# Altium PCB PCB_LineFollowerFullPCB_2024-01-03.pcbdoc
Units mm, origin at the board's own origin, x right, y up, seen from the top; angles counter-clockwise.
Board outline 305.31 x 202.82 mm, 2 copper layers (Top Layer, Bottom Layer); 47 components, 55 nets, 293 pads, 61 vias.
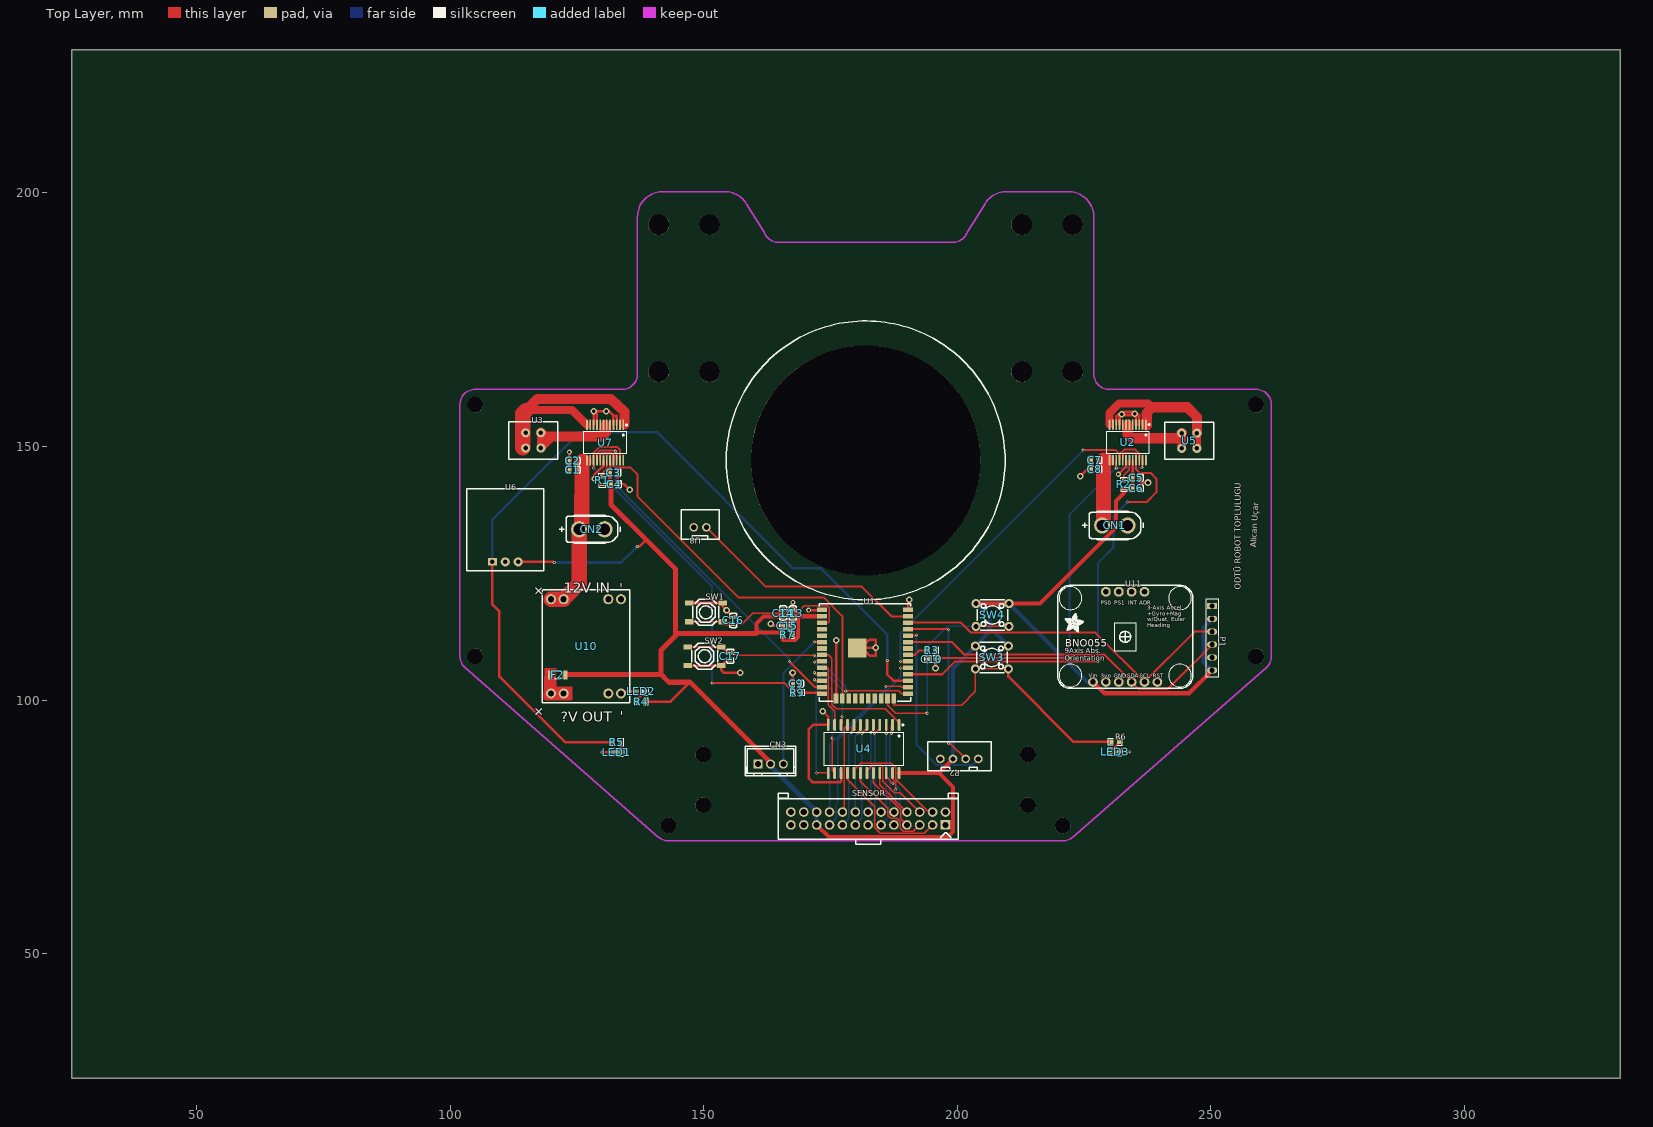
[diagram p0: Top Layer view]
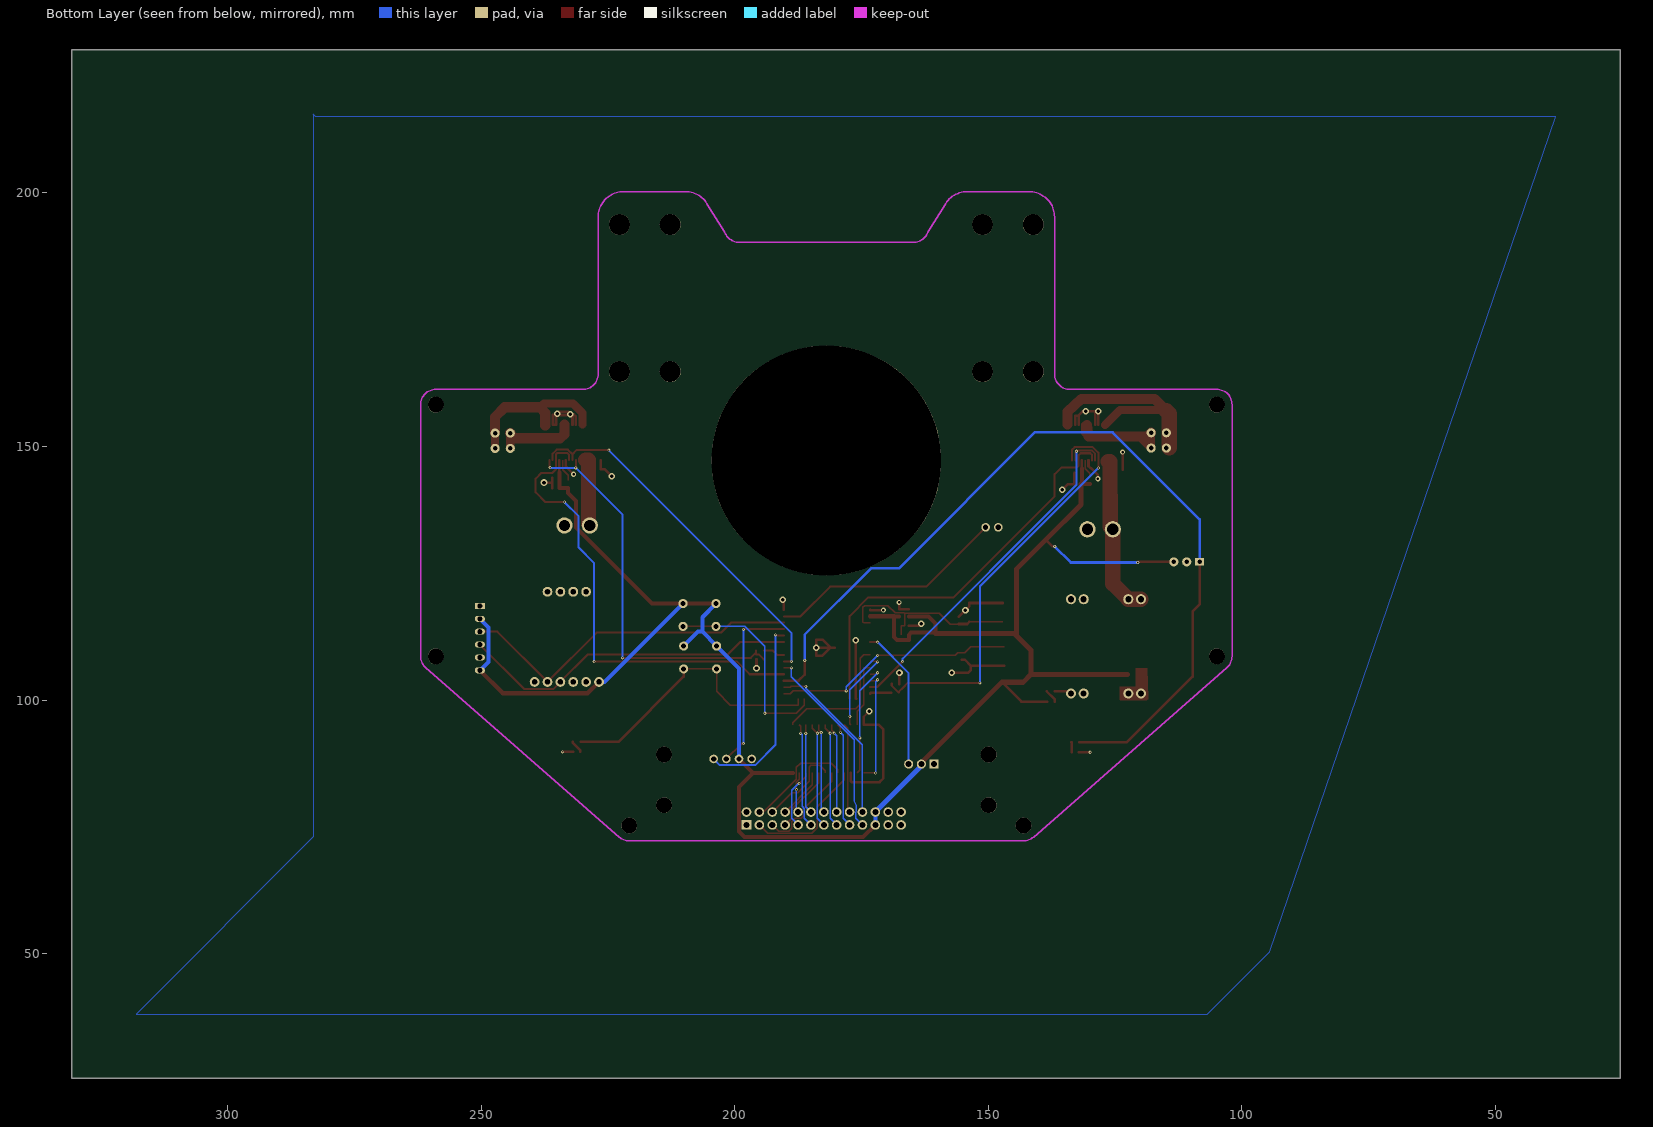
[diagram p1: Bottom Layer view, seen from below]

## Layer stack, top to bottom
Top Layer: signal copper (thickness not stored)
Dielectric: dielectric 0.32, FR-4, Dk 4.8
Bottom Layer: signal copper (thickness not stored)

## Board outline
330.708,25.4 25.4,25.4 25.4,228.219 330.708,228.219

## Components (designator, comment, footprint, x,y, rotation, side; value= is the part's Value field where it differs from the comment)
C1 "100nF" C0603 124.206,145.415 r180 top
C2 "10uF" C0603 124.206,147.193 r180 top
C3 "10uF" C0603 132.263,144.852 r0 top
C4 "100nF" C0603 132.39,142.566 r0 top
C5 "100nF" C0603 235.26,143.836 r0 top
C6 "10uF" C0603 235.26,141.804 r0 top
C7 "10uF" C0603 227.076,147.32 r180 top
C8 "100nF" C0603 227.076,145.542 r180 top
C9 "1nF" C0603 168.275,103.251 r180 top
C10 "1nF" C0603 195.001,108.022 r0 top
C13 "100nF" C0603 167.569,117.166 r90 top
C14 "22uF" C0603 165.664,117.166 r270 top
C15 "100nF" C0603 166.426,114.626 r180 top
C16 "100nF" C0603 155.829,115.697 r270 top
C17 "100nF" C0603 155.25,108.657 r270 top
CN1 "XT30UPB-F" CONN-TH_XT30UPB-F 231.069,134.438 r0 top
CN2 "XT30UPB-F" CONN-TH_XT30UPB-F 127.945,133.676 r0 top
CN3 "2.54-1*3P" CONN-TH_C722693 163.195,87.376 r0 top
F2 "PTCTHERMISTOR1206" PTC-1206 121.214,104.974 r180 top
LED1 "19-217/BHC-ZL1M2RY/3T" LED0603-FD_BLUE 132.842,89.718 r0 top
LED2 "KT-0603R" LED0603-RD 137.668,101.727 r0 top
LED3 "19-217/BHC-ZL1M2RY/3T" LED0603-FD_BLUE 231.14,89.789 r180 top
P1 "Header 1x6" 1X6-PIN-HEADER-2.54MM_ES 250.246,118.563 r270 top
P2 "XH-2.54-4P" CONN-TH_4P-P2.50-XH2.54-4P 200.406,88.392 r180 top
R1 "10kΩ" R0603 129.977,143.328 r270 top
R2 "10kΩ" R0603 232.847,142.566 r270 top
R3 "2kΩ" R0603 195.001,109.8 r0 top
R4 "100Ω" R0603 137.668,99.695 r0 top
R5 "51Ω" R0603 132.842,91.694 r0 top
R6 "51Ω" R0603 231.144,91.765 r0 top
R7 "10kΩ" R0603 166.426,112.848 r0 top
R9 "2kΩ" R0603 168.402,101.473 r180 top
SENSOR "X9555WV-2X13E-PTV01" CONN-TH_26P-P2.54_XKB_X9555WV-2X13E-PTV01 182.428,76.653 r0 top
SW1 "TS-1187A-B-A-B" SW-SMD_4P-L5.1-W5.1-P3.70-LS6.5-TL-2 150.424,117.293 r0 top
SW2 "TS-1187A-B-A-B" SW-SMD_4P-L5.1-W5.1-P3.70-LS6.5-TL-2 150.17,108.657 r0 top
SW3 "Tact6x6" TACTILE_SWITCH_6X6 206.812,108.403 r0 top
SW4 "Tact6x6" TACTILE_SWITCH_6X6 206.939,116.785 r0 top
U1 "ESP32-WROOM-32U(4MB)" WIFI-SMD_ESP32-WROOM-32UE-A 181.793,109.038 r0 top
U2 "TB6612FNG(O,C,8,EL" SSOP-24_L8.4-W5.8-P0.65-LS7.8-BL 233.609,150.814 r180 top
U3 "0430450412_ep" 0430450412_EP 111.562,154.885 r0 top
U4 "CD74HC4067M96" SOIC-24_L15.4-W7.5-P1.27-LS10.3-BL 181.539,90.369 r180 top
U5 "0430450412_ep" 0430450412_EP 250.571,147.447 r180 top
U6 "MebStart" MEBSTART_MODUL 110.871,127.254 r0 top
U7 "TB6612FNG(O,C,8,EL" SSOP-24_L8.4-W5.8-P0.65-LS7.8-BL 130.564,150.764 r180 top
U8 "ESC Logic" CONN-TH_2P-P2.50-XH2.54-2P 149.281,134.057 r180 top
U10 "MP1584EN-12VDCDCBuck" MP1584 119.888,119.888 r0 top
U11 "ADAFRUIT BNO055" ADAFRUIT-BNO055_NO_HOLES 233.101,112.467 r0 top

## Footprints (in the part's own frame and the unit in brackets; to place one, negate y for a bottom-side part, rotate by r counter-clockwise, add the part's x,y. Pads: shape width x height; smd on the part's side, far side on the other; paste and mask are expansions set on the pad)
1X6-PIN-HEADER-2.54MM_ES [mm]
  rect 1.2x2 hole 0.9 slot 0.9 at 90 deg paste+0 mask+0.102: 1(0,0)
  oval 1.2x2 hole 0.9 slot 0.9 at 90 deg paste+0 mask+0.102: 2(2.54,0) 3(5.08,0) 4(7.62,0) 5(10.16,0) 6(12.7,0)
  silkscreen extent -1.27,-1.27 13.96,1.27
0430450412_EP [mm]
  round 1.8 hole 0.914 paste+0 mask+0.051: 1(6.325,-2.185) 2(6.325,-5.185) 3(3.325,-2.185) 4(3.325,-5.185)
  silkscreen extent 0,-7.37 9.65,0
ADAFRUIT-BNO055_NO_HOLES [mil]
  round 76 hole 39.36 paste+0 mask+2: 1(-250,-350) 2(-150,-350) 3(-50,-350) 4(50,-350) 5(150,-350) 6(250,-350) 7(150,350) 8(50,350) 9(-50,350) 10(-150,350)
  silkscreen extent -525,-400 525,400
C0603 [mm]
  rect 0.8x0.9 smd paste+0 mask+0.051: 1(-0.7,0) 2(0.7,0)
  silkscreen extent -1.41,-0.71 1.39,0.72
CONN-TH_2P-P2.50-XH2.54-2P [mm]
  round 1.7 hole 1.05 paste+0 mask+0.05: 1(1.25,0) 2(-1.25,0)
  silkscreen extent -3.75,-3.42 3.75,2.37
CONN-TH_4P-P2.50-XH2.54-4P [mm]
  round 1.7 hole 1.05 paste+0 mask+0.05: 1(3.75,0) 2(1.25,0) 3(-1.25,0) 4(-3.75,0)
  silkscreen extent -6.25,-3.42 6.25,2.37
CONN-TH_26P-P2.54_XKB_X9555WV-2X13E-PTV01 [mm]
  rect 1.9x1.9 hole 1.2 paste+0 mask+0.05: 1(15.24,-1.27)
  round 1.9 hole 1.2 paste+0 mask+0.05: 2(15.24,1.27) 3(12.7,-1.27) 4(12.7,1.27) 5(10.16,-1.27) 6(10.16,1.27) 7(7.62,-1.27) 8(7.62,1.27) 9(5.08,-1.27) 10(5.08,1.27) 11(2.54,-1.27) 12(2.54,1.27) 13(0,-1.27) 14(0,1.27) 15(-2.54,-1.27) 16(-2.54,1.27) 17(-5.08,-1.27) 18(-5.08,1.27) 19(-7.62,-1.27) 20(-7.62,1.27) 21(-10.16,-1.27) 22(-10.16,1.27) 23(-12.7,-1.27) 24(-12.7,1.27) 25(-15.24,-1.27) 26(-15.24,1.27)
  silkscreen extent -17.78,-5.07 17.78,4.95
CONN-TH_C722693 [mm]
  rect 1.8x1.8 hole 1.2 paste+0 mask+0.051: 1(-2.5,0)
  round 1.8 hole 1.2 paste+0 mask+0.051: 2(0,0) 3(2.5,0)
  silkscreen extent -5,-2.3 5,3.5
CONN-TH_XT30UPB-F [mm]
  round 3.2 hole 2.2 paste+0 mask+0.051: 1(-2.5,0) 2(2.5,0)
  silkscreen extent -6.4,-2.8 5.6,2.8
LED0603-FD_BLUE [mm]
  rect 0.8x0.9 smd paste+0 mask+0.051: 1(-0.72,0) 2(0.72,0)
  silkscreen extent -1.5,-0.76 1.38,0.76
LED0603-RD [mm]
  rect 0.8x0.8 smd paste+0 mask+0.051: 1(-0.799,-0.003) 2(0.799,0.004)
  silkscreen extent -1.49,-0.75 1.39,0.76
MEBSTART_MODUL [mm]
  rect 1.8x1.524 hole 0.914 paste+0 mask+0.051: 1(-2.54,0)
  round 1.8 hole 0.914 paste+0 mask+0.051: 2(0,0) 3(2.54,0)
  silkscreen extent -7.56,-1.71 7.56,14.41
MP1584 [mm]
  round 2 hole 1.2 paste+0 mask+0.051: 1(0,0) 2(2.5,0) 3(11.3,0) 4(13.8,0) 5(0,-18.6) 6(2.5,-18.6) 7(11.3,-18.6) 8(13.8,-18.6)
  silkscreen extent -1.7,-20.46 15.5,1.86
PTC-1206 [mil]
  rect 39.4x70.9 smd paste+0 mask+2: 1(-55,0) 2(55,0)
  silkscreen extent -25,-30 25,30
R0603 [mm]
  rect 0.806x0.864 smd paste-100 mask+0.051: 1(-0.753,0) 2(0.753,0)
  silkscreen extent -1.39,-0.66 1.39,0.66
SOIC-24_L15.4-W7.5-P1.27-LS10.3-BL [mm]
  oval 0.574x2.388 smd paste+0 mask+0.051: 1(-6.985,-4.744) 2(-5.715,-4.744) 3(-4.445,-4.744) 4(-3.175,-4.744) 5(-1.905,-4.744) 6(-0.635,-4.744) 7(0.635,-4.744) 8(1.905,-4.744) 9(3.175,-4.744) 10(4.445,-4.744) 11(5.715,-4.744) 12(6.985,-4.744) 13(6.985,4.744) 14(5.715,4.744) 15(4.445,4.744) 16(3.175,4.744) 17(1.905,4.744) 18(0.635,4.744) 19(-0.635,4.744) 20(-1.905,4.744) 21(-3.175,4.744) 22(-4.445,4.744) 23(-5.715,4.744) 24(-6.985,4.744)
  silkscreen extent -7.87,-4.89 7.78,3.32
SSOP-24_L8.4-W5.8-P0.65-LS7.8-BL [mm]
  oval 0.364x2.082 smd paste+0 mask+0.051: 1(-3.575,-3.491) 2(-2.925,-3.491) 3(-2.275,-3.491) 4(-1.625,-3.491) 5(-0.975,-3.491) 6(-0.325,-3.491) 7(0.325,-3.491) 8(0.975,-3.491) 9(1.625,-3.491) 10(2.275,-3.491) 11(2.925,-3.491) 12(3.575,-3.491) 13(3.575,3.491) 14(2.925,3.491) 15(2.275,3.491) 16(1.625,3.491) 17(0.975,3.491) 18(0.325,3.491) 19(-0.325,3.491) 20(-0.975,3.491) 21(-1.625,3.491) 22(-2.275,3.491) 23(-2.925,3.491) 24(-3.575,3.491)
  silkscreen extent -4.36,-3.64 4.18,2.22
SW-SMD_4P-L5.1-W5.1-P3.70-LS6.5-TL-2 [mm]
  rect 1.7x1 smd paste+0 mask+0.051: 1(-3.3,1.85) 2(3.3,1.85) 3(-3.3,-1.85) 4(3.3,-1.85)
  silkscreen extent -2.55,-2.55 2.55,2.55
TACTILE_SWITCH_6X6 [mm]
  round 1.8 hole 1 paste+0 mask+0.051: 1(-3.25,2.25) 1(3.25,2.25) 3(-3.25,-2.25) 3(3.25,-2.25)
  silkscreen extent -3,-3 3,3
WIFI-SMD_ESP32-WROOM-32UE-A [mm]
  rect 2x0.9 smd paste+0 mask+0.051: 1(-8.5,8.755) 2(-8.5,7.485) 3(-8.5,6.215) 4(-8.5,4.945) 5(-8.5,3.675) 6(-8.5,2.405) 7(-8.5,1.135) 8(-8.5,-0.135) 9(-8.5,-1.405) 10(-8.5,-2.675) 11(-8.5,-3.945) 12(-8.5,-5.215) 13(-8.5,-6.485) 14(-8.5,-7.755) 25(8.5,-7.755) 26(8.5,-6.485) 27(8.5,-5.215) 28(8.5,-3.945) 29(8.5,-2.675) 30(8.5,-1.405) 31(8.5,-0.135) 32(8.5,1.135) 33(8.5,2.405) 34(8.5,3.675) 35(8.5,4.945) 36(8.5,6.215) 37(8.5,7.485) 38(8.5,8.755)
  rect 0.9x2 smd paste+0 mask+0.051: 15(-5.715,-8.755) 16(-4.445,-8.755) 17(-3.175,-8.755) 18(-1.905,-8.755) 19(-0.635,-8.755) 20(0.635,-8.755) 21(1.905,-8.755) 22(3.175,-8.755) 23(4.445,-8.755) 24(5.715,-8.755)
  rect 3.7x3.7 smd paste+0 mask+0.051: 39(-1.5,1.255)
  silkscreen extent -9,-9.27 9.02,9.95

## Free pads (board coordinates)
  round 3.127 hole 3.127 unplated paste+0: ""(104.931,108.617) ""(104.931,108.617) ""(104.931,158.256) ""(104.931,158.256) ""(143.058,75.256) ""(143.058,75.256) ""(149.931,79.256) ""(149.931,79.256) ""(149.931,89.256) ""(149.931,89.256) ""(213.931,79.256) ""(213.931,79.256) ""(213.931,89.256) ""(213.931,89.256) ""(220.803,75.256) ""(220.803,75.256) ""(258.931,108.617) ""(258.931,108.617) ""(258.931,158.256) ""(258.931,158.256)
  round 4.127 hole 4.127 unplated paste+0: ""(141.131,164.756) ""(141.131,164.756) ""(141.131,193.756) ""(141.131,193.756) ""(151.131,164.756) ""(151.131,164.756) ""(151.131,193.756) ""(151.131,193.756) ""(212.731,164.756) ""(212.731,164.756) ""(212.731,193.756) ""(212.731,193.756) ""(222.731,164.756) ""(222.731,164.756) ""(222.731,193.756) ""(222.731,193.756)
  round 45.3 hole 45.3 unplated paste+0: ""(181.931,147.256) ""(181.931,147.256)

## Via types
v1: diameter 0.61, hole 0.305, Top Layer to Bottom Layer, tented both sides, 35 vias
v2: diameter 1.3, hole 0.7, Top Layer to Bottom Layer, tented both sides, 16 vias
v3: diameter 1, hole 0.5, Top Layer to Bottom Layer, tented both sides, 5 vias
v4: diameter 0.62, hole 0.31, Top Layer to Bottom Layer, tented both sides, 5 vias

## Nets (pads, with @x,y where several pads share a name; then routed paths per layer and width w, separated by ;. In a path a pad name is that pad's centre, name@x,y a point inside that pad or via, vN(x,y) a via of type N, cw(c..) or ccw(c..) an arc to the next point about the centre after c; other vN are vias at no path point)
3.3V: C3.1 C4.1 C5.1 C6.1 C13.1 C14.2 CN3.2 F2.1 P1.2 P1.6 P2.2 R1.2 R2.2 R4.2 R7.1 SENSOR.21 SENSOR.22 SW3.1 SW4.1 U1.2 U2.20 U4.24 U6.3 U7.20 U11.1 | length 397.8
  Top Layer w0.5: U6.3 120.396,127.254 v4(120.523,127.127) ; 131.539,145.699 U7.20 ; v4(136.906,130.302) 137.353,130.302 138.654,131.603 ; R4.2 143.492,99.695 147.319,103.522 ; 234.56,144.838 234.584,144.863 234.584,145.749 U2.20
  Top Layer w0.8: R1.2 130.729,142.575 130.738,142.566 C4.1@131.419,142.566 ; 131.539,145.699 131.539,144.876 131.563,144.852 131.563,142.71 C4.1@131.419,142.566 ; C4.1@131.69,142.566 C4.1@131.419,142.566 ; 164.722,113.323 160.401,113.323 160.401,115.063 161.806,116.465 C14.2@165.664,116.465 ; 164.721,113.324 165.197,113.324 R7.1 165.673,111.864 165.675,111.862 167.998,111.862 168.571,112.435 168.571,116.466 ; C13.1 168.571,116.466 ; SENSOR.21 174.685,72.966 198.084,72.966 199.172,74.054 199.172,82.842 196.389,85.625 ; U1.2 168.629,116.523 168.571,116.466 ; U4.24 196.389,85.625 ; P2.2 196.389,85.625 ; SW4.1@203.689,119.035 SW4.1@210.189,119.035 ; SW4.1@210.188,119.036 216.281,119.036 231.267,134.022 231.267,139.277 232.847,140.857 R2.2 233.599,141.813 233.608,141.804 C6.1@234.377,141.804 ; U11.1 228.981,101.347 245.73,101.347 P1.6 ; C6.1@234.56,141.804 C6.1@234.377,141.804 ; 234.56,144.838 234.56,143.836 234.56,141.987 C6.1@234.377,141.804
  Top Layer w1: F2.1@122.555,105.029 141.478,105.029 ; C4.1@131.689,142.566 131.689,138.566 138.654,131.603 ; 138.654,131.603 144.462,125.794 144.462,112.71 ; 160.401,113.12 144.872,113.12 141.605,109.856 141.605,105.03 143.114,103.521 145.466,103.521 147.319,103.522 163.195,87.645 CN3.2
  Bottom Layer w0.5: v4(120.523,127.127) 133.731,127.127 v4(136.906,130.302)
  Bottom Layer w0.8: SENSOR.21 SENSOR.22 ; P2.2 199.156,106.247 203.562,110.653 206.392,113.482 ; SW4.1@203.689,119.035 206.392,116.333 206.392,113.482 ; SW3.1@210.062,110.653 207.233,113.482 206.392,113.482 ; SW4.1@210.189,119.035 210.189,119.021 225.633,103.577 U11.1 ; P1.6 248.56,107.549 248.56,114.337 P1.2
  Bottom Layer w1: CN3.2 163.195,86.996 SENSOR.22
12V: C1.1 C2.1 C7.1 C8.1 CN1.1 CN2.1 U2.13 U2.14 U2.24 U7.13 U7.14 U7.24 U10.1 U10.2 | length 45
  Top Layer w3: U10.1 U10.2 125.445,122.945 CN2.1 125.936,134.169 125.984,147.066 126.365,147.066 ; CN1.1 228.854,134.723 228.854,147.323 229.362,147.32
BUTON1: R6.1 SW3.3 U1.24 | length 56.6
  Top Layer w0.254: 187.508,99.004 U1.24 ; 187.508,99.005 200.858,99.005 203.563,101.708 SW3.3@203.563,106.153 ; SW3.3@203.562,106.153 SW3.3@210.062,106.153
  Top Layer w0.5: SW3.3@210.062,106.153 210.062,104.644 222.941,91.765 R6.1
BUTON2: SW4.3 U1.23 | length 40.7
  Top Layer w0.254: U1.23 186.238,99.004 187.848,97.394 v1(194.052,97.394) ; SW4.3@203.689,114.535 SW4.3@210.189,114.535
  Bottom Layer w0.254: v1(194.052,97.394) 194.052,110.586 198.001,114.535 SW4.3@203.689,114.535
ESCPWM: U1.37 U8.2 | length 47
  Top Layer w0.4: U8.2 162.221,122.367 181.179,122.367 187.024,116.523 U1.37
ESP32RX: P2.4 U1.34 | length 37.7
  Top Layer w0.4: U1.34 191.645,112.713 191.8,112.868 v1(191.916,112.868)
  Bottom Layer w0.4: v1(191.916,112.868) 191.916,91.244 195.973,87.187 202.951,87.187 P2.4
ESP32TX: P2.3 U1.35 | length 35.1
  Top Layer w0.4: U1.35 198.247,113.983 v1(198.295,113.935) ; v1(198.295,91.428) 198.62,91.428 P2.3
  Bottom Layer w0.4: v1(198.295,91.428) v1(198.295,113.935)
EVEN: SENSOR.19 U1.29 | length 38.3
  Top Layer w0.254: v1(188.807,106.363) 189.014,106.363 U1.29
  Bottom Layer w0.254: SENSOR.19 176.149,76.724 176.022,79.248 176.403,80.01 176.403,92.198 188.809,104.603 v1(188.807,106.363)
F2_2: F2.2 U10.5 U10.6
GND: C1.2 C2.2 C3.2 C4.2 C5.2 C6.2 C7.2 C8.2 C9.2 C10.2 C13.2 C14.1 C15.2 C16.1 C17.2 CN1.2 CN2.2 CN3.1 LED1.1 LED2.1 LED3.1 P1.1 P1.5 P2.1 SENSOR.1 SENSOR.2 SENSOR.23 SENSOR.24 SW1.1 SW1.2 SW2.3 SW2.4 U1.1 U1.15 U1.38 U1.39 U2.3 U2.4 U2.9 U2.10 U2.18 U4.12 U4.15 U6.2 U7.3 U7.4 U7.9 U7.10 U7.18 U8.1 U10.3 U10.4 U10.7 U10.8 U11.3 | length 154.4
  Top Layer w0.5: v3@123.444,148.971 v3(123.506,148.909) C2.2 C1.2 ; U7.10 v2(128.289,156.972) v2@128.905,156.972 ; v3(128.397,143.637) 128.397,144.399 129.667,145.669 129.794,145.669 130.239,146.114 U7.18 ; U7.9 128.939,156.879 v2@128.905,156.972 ; v4(129.921,89.718) LED1.1 ; U7.4 132.189,156.084 ; U7.3 132.84,156.079 132.189,156.084 ; C3.2 133.09,144.725 C4.2 134.294,142.566 v2(135.382,141.478) ; U10.8 134.124,101.724 LED2.1 ; SW2.3 SW2.4 ; SW1.1 SW1.2 153.724,118.502 v2(154.5,117.726) C16.1 ; C17.2 154.62,107.957 SW2.4 ; v2(157.226,105.41) 153.924,105.41 153.47,105.864 SW2.4 ; v2(163.195,115.062) 163.631,114.626 C15.2@165.726,114.626 ; C14.1 C13.2 v3(167.569,119.253) ; C9.2@167.513,103.124 v2(167.513,105.41) ; v3(170.688,117.729) 173.229,117.729 U1.1 ; v2(173.482,97.79) 174.554,96.718 U4.12 171.567,95.113 170.688,94.234 170.688,84.582 171.45,83.82 176.911,83.82 177.094,84.003 U4.15 ; U1.15 176.149,100.354 v2(176.149,111.76) ; U1.38 190.293,119.554 v2(190.5,119.761) ; v2(195.701,106.299) C10.2 ; v2(224.282,144.145) 225.679,145.542 C8.2 C7.2 ; U2.10 231.334,155.896 231.648,156.21 ; v3(231.775,144.526) 233.284,146.035 U2.18 ; LED3.1 v4(233.934,89.789) ; U2.9 231.984,155.874 231.648,156.21 ; v2(232.41,156.337) 231.775,156.337 231.648,156.21 ; v2(232.41,156.337) 232.41,156.465 232.791,156.846 234.569,156.846 v2(234.95,156.464) ; v2@232.75,156.21 234.561,156.21 235.839,156.21 235.884,156.165 U2.3 U2.4 235.234,155.799 235.077,156.21 234.95,156.337 v2(234.95,156.464) ; C6.2 C5.2 ; 235.96,142.893 v2(237.599,142.893) v2@237.744,142.748 ; v2@128.905,156.972 v2(130.81,156.972) 131.301,156.972 132.189,156.084 ; U1.39@180.293,110.293 181.172,110.293 182.753,108.712 183.896,108.712 v2(183.896,110.293) ; U1.39@180.293,110.293 181.032,110.293 182.499,111.76 182.626,111.887 183.896,111.887 v2(183.896,110.293) ; U1.39@180.293,110.293 v2(183.896,110.293) ; U1.39@180.295,110.293 180.904,110.293 U1.39@180.295,110.293
LED1: R5.1 U1.27 U6.1 | length 173.2
  Top Layer w0.5: U6.1 108.331,118.872 109.728,117.475 109.728,104.648 122.682,91.694 R5.1 ; v4(186.182,107.823) 186.182,105.029 187.388,103.823 U1.27
  Bottom Layer w0.5: U6.1 108.331,135.636 125.476,152.781 140.843,152.781 167.64,125.984 173.101,125.984 186.182,112.903 v4(186.182,107.823)
LED1_2: LED1.2 R5.2 | length 2
  Top Layer w0.5: LED1.2 133.562,91.661 R5.2
LEFTIN1: U1.16 U7.17 U7.21 | length 82.3
  Top Layer w0.4: U7.17 129.589,148.391 129.865,148.668 131.798,148.668 132.189,148.277 U7.21 132.189,146.175 132.532,145.833 135.601,145.833 136.906,144.527 136.906,140.153 156.815,120.245 173.64,120.245 177.348,116.536 U1.16@177.348,100.283
LEFTIN2: U1.13 U7.16 U7.22 | length 71.4
  Top Layer w0.4: U7.16 128.939,148.604 129.573,149.239 132.43,149.239 v1(132.61,149.059) 132.839,148.83 U7.22 ; v1(166.896,107.598) 171.941,102.553 U1.13
  Bottom Layer w0.4: v1(132.61,149.059) 132.61,142.45 166.896,108.164 v1(166.896,107.598)
LEFTMOTOROUT1: U3.3 U3.4 U7.1 U7.2 U7.11 U7.12 | length 44.7
  Top Layer w1.6: 115.062,157.226 124.018,157.226 U7.12
  Top Layer w2: 114.887,157.052 117.221,159.386 131.572,159.386 134.366,156.846 134.366,154.306
  Top Layer w3: U3.4@114.3,149.757 114.3,152.757 114.3,156.465 114.887,157.052
LEFTMOTOROUT2: U3.1 U3.2 U7.5 U7.6 U7.7 U7.8 | length 23.5
  Top Layer w1.6: U3.1 U3.2 117.887,149.728 120.051,151.892 ; 130.239,151.956 130.889,152.702 U7.6
  Top Layer w2: U3.1 118.631,151.957 130.239,151.957 130.556,154.179
LEFTMOTORPWM: R9.1 U1.14 | length 4.2
  Top Layer w0.5: R9.1 173.103,101.473 U1.14
M1: U1.9 U4.10 | length 16.3
  Top Layer w0.254: v1(171.815,107.524) 171.905,107.524 172.014,107.633 U1.9 ; U4.10 177.305,95.324 v1(177.305,96.769)
  Bottom Layer w0.254: v1(171.815,107.524) 177.305,102.034 v1(177.305,96.769)
M2: U1.10 U4.11 | length 13
  Top Layer w0.254: U1.10 174.572,106.363 174.574,106.362 174.574,99.036 175.824,97.785 U4.11
M3: U1.11 U4.14 | length 23.1
  Top Layer w0.254: v1(171.815,105.395) 172.014,105.196 172.014,105.093 U1.11 ; v1(175.329,92.529) 175.329,86.121 U4.14
  Bottom Layer w0.254: v1(171.815,105.395) 175.329,101.881 v1(175.329,92.529)
M4: U1.12 U4.13 | length 22.4
  Top Layer w0.254: v1(171.829,104.008) 172.014,103.823 U1.12 ; v1(172.216,85.625) U4.13
  Bottom Layer w0.254: v1(171.829,104.008) 172.216,103.622 v1(172.216,85.625)
ODD: SENSOR.20 U1.26 | length 33.8
  Top Layer w0.254: v1(185.955,102.714) 188.854,102.714 189.014,102.553 U1.26
  Bottom Layer w0.254: SENSOR.20 174.808,91.18 185.955,102.327 v1(185.955,102.714)
PWMLEFT: C9.1 R9.2 U7.15 U7.23 | length 82.4
  Top Layer w0.4: v1(128.289,145.763) U7.15 128.289,148.769 129.41,149.891 132.965,149.891 133.489,149.367 U7.23 ; v1(151.65,103.382) 165.875,103.382 166.823,102.434 167.649,101.608 R9.2 169.031,102.855 169.031,103.283 168.999,103.251 C9.1
  Bottom Layer w0.4: v1(128.289,145.763) 151.65,122.402 v1(151.65,103.382)
PWMRIGHT: C10.1 R3.2 U2.15 U2.23 | length 78.9
  Top Layer w0.4: C10.1@194.301,108.022 195.295,109.016 195.754,109.016 R3.2@195.754,109.408 ; R3.2 R3.2@195.754,109.408 ; v1(222.098,108.327) 196.836,108.327 R3.2@195.754,109.408 ; v1(231.334,145.782) U2.15 ; v1(236.406,145.822) 236.534,145.95 U2.23
  Bottom Layer w0.4: v1(222.098,108.327) 222.098,136.546 v1(231.334,145.782) 236.366,145.782 v1(236.406,145.822)
QTRSIGNAL: U1.8 U4.1 | length 26.5
  Top Layer w0.254: U1.8 174.572,108.903 175.264,108.212 175.264,99.178 176.114,98.328 185.75,98.328 188.524,95.554 U4.1
R2_1: R2.1 U2.19 | length 4.5
  Top Layer w0.254: R2.1 232.847,144.353 233.904,145.409 233.904,147.293 U2.19
R4_1: LED2.2 R4.1 | length 2.7
  Top Layer w0.5: R4.1 136.914,100.179 LED2.2
R6_2: LED3.2 R6.2 | length 2.6
  Top Layer w0.5: LED3.2 230.42,90.085 231.897,91.562 R6.2
REFINPUT: CN3.3 U1.6 | length 28.1
  Top Layer w0.4: v1(171.815,111.443) U1.6
  Bottom Layer w0.4: CN3.3 165.695,105.323 v1(171.815,111.443)
RIGHTIN1: U1.28 U2.17 U2.21 | length 93.1
  Top Layer w0.4: U1.28@190.292,105.094 197.041,105.094 199.538,107.59 v1(227.709,107.59) ; U2.17 232.634,148.344 233.008,148.718 234.976,148.718 235.234,148.459 U2.21 ; v1@233.591,139.053 237.351,139.053 239.268,140.971 239.268,143.638 238.125,144.781 235.966,144.781 235.235,145.513 U2.21
  Bottom Layer w0.4: v1(227.709,107.59) 227.709,127.012 230.788,130.091 230.788,136.25 v1(233.592,139.054)
RIGHTIN2: U1.30 U2.16 U2.22 | length 72.6
  Top Layer w0.4: v1(188.809,107.633) 188.941,107.633 U1.30 ; v1(224.81,149.271) 231.201,149.271 231.984,148.489 ; U2.16 231.984,148.489 ; U2.22 235.884,148.601 235.101,149.384 232.88,149.384 231.984,148.489
  Bottom Layer w0.4: v1(188.809,107.633) 188.809,113.27 v1(224.81,149.271)
RIGHTMOTOROUT1: U2.1 U2.2 U2.11 U2.12 U5.3 U5.4 | length 31.6
  Top Layer w1.6: U2.12@230.033,154.306 230.033,156.628 231.902,158.497 237.617,158.497 238.379,157.735 ; U5.3 U5.4
  Top Layer w2: U2.1@237.363,154.178 237.363,156.591 238.379,157.735 245.364,157.735 247.269,155.83 U5.4
RIGHTMOTOROUT2: U2.5 U2.6 U2.7 U2.8 U5.1 U5.2 | length 16.5
  Top Layer w1.6: U5.1 U5.2
  Top Layer w2: 233.553,154.305 233.553,152.4 234.442,151.638 243.713,151.638 U5.2
RIGHTMOTORPWM: R3.1 U1.31 | length 4.3
  Top Layer w0.4: U1.31 191.645,108.903 192.542,109.8 R3.1
SCL: P1.3 U1.36 U11.5 | length 68.9
  Top Layer w0.4: U1.36 200.735,115.253 202.707,113.281 227.207,113.281 U11.5 246.817,113.483 P1.3
SDA: P1.4 U1.33 U11.4 | length 67.5
  Top Layer w0.4: U1.33 198.901,111.443 201.359,108.986 228.963,108.986 U11.4 235.809,102.14 241.443,102.14 P1.4
SENSOR1: SENSOR.18 U4.9 | length 17.8
  Top Layer w0.254: SENSOR.18 177.673,77.923 177.673,94.423 U4.9
SENSOR2: SENSOR.17 U4.8 | length 20.7
  Top Layer w0.254: v1(179.14,93.632) 179.14,94.619 U4.8
  Bottom Layer w0.254: SENSOR.17 178.618,76.653 178.618,93.111 v1(179.14,93.632)
SENSOR3: SENSOR.16 U4.7 | length 17.6
  Top Layer w0.254: v1(180.396,93.502) 180.904,94.01 U4.7
  Bottom Layer w0.254: SENSOR.16 179.888,92.994 v1(180.396,93.502)
SENSOR4: SENSOR.15 U4.6 | length 20.7
  Top Layer w0.254: v1(181.19,93.453) 182.174,94.437 U4.6
  Bottom Layer w0.254: SENSOR.15 181.19,76.685 v1(181.19,93.453)
SENSOR5: SENSOR.14 U4.5 | length 17.6
  Top Layer w0.254: v1(182.928,93.582) 183.444,94.098 U4.5
  Bottom Layer w0.254: SENSOR.14 182.928,78.423 v1(182.928,93.582)
SENSOR6: SENSOR.13 U4.4 | length 20.7
  Top Layer w0.254: v1(183.698,93.45) 184.714,94.466 U4.4
  Bottom Layer w0.254: SENSOR.13 183.698,76.653 v1(183.698,93.45)
SENSOR7: SENSOR.12 U4.3 | length 17.6
  Top Layer w0.254: v1(185.984,93.426) U4.3
  Bottom Layer w0.254: SENSOR.12 185.984,78.939 v1(185.984,93.426)
SENSOR8: SENSOR.11 U4.2 | length 20.7
  Top Layer w0.254: v1(187.011,93.421) 187.011,94.87 U4.2
  Bottom Layer w0.254: SENSOR.11 186.238,76.653 186.238,78.616 186.71,79.088 186.71,93.12 v1(187.011,93.421)
SENSOR9: SENSOR.10 U4.23 | length 8.1
  Top Layer w0.254: U4.23 187.254,84.421 187.885,83.791 187.885,82.414 v1(187.818,82.347)
  Bottom Layer w0.254: SENSOR.10 187.818,78.233 v1(187.818,82.347)
SENSOR10: SENSOR.9 U4.22 | length 12
  Top Layer w0.254: U4.22 185.984,84.845 v1(187.299,83.53)
  Bottom Layer w0.254: v1(187.299,83.53) 187.462,83.53 188.778,82.214 188.778,76.653 SENSOR.9
SENSOR11: SENSOR.8 U4.21 | length 9.9
  Top Layer w0.254: U4.21 184.714,83.257 SENSOR.8
SENSOR12: SENSOR.7 U4.20 | length 13
  Top Layer w0.254: U4.20 183.444,83.74 188.818,78.366 188.818,76.614 SENSOR.7
SENSOR13: SENSOR.6 U4.19 | length 16.7
  Top Layer w0.254: U4.19 182.174,86.086 183.197,87.109 184.99,87.109 185.349,86.749 185.349,83.987 187.575,81.761 188.75,81.761 SENSOR.6
SENSOR14: SENSOR.5 U4.18 | length 19.5
  Top Layer w0.254: U4.18 180.904,83.978 186.238,78.644 186.238,77.29 186.836,76.692 188.051,76.692 188.778,75.965 188.778,74.69 189.339,74.129 191.334,74.129 SENSOR.5
SENSOR15: SENSOR.4 U4.17 | length 22
  Top Layer w0.254: U4.17 179.634,86.246 180.955,87.568 187.022,87.568 187.828,86.761 187.828,84.424 194.329,77.923 SENSOR.4
SENSOR16: SENSOR.3 U4.16 | length 25.6
  Top Layer w0.254: U4.16 178.364,84.31 183.698,78.976 183.698,74.845 184.846,73.698 193.443,73.698 SENSOR.3
U1_3: C15.1 C16.2 R7.2 SW1.3 SW1.4 U1.3 | length 38.8
  Top Layer w0.254: SW1.3 SW1.4 ; C16.2 157.541,114.997 159.693,117.148 166.322,117.148 166.446,117.021 ; R7.2 167.179,113.559 167.126,113.613 C15.1 166.447,114.626 166.447,117.021 166.611,117.185 168.327,117.185 169.785,118.643 174.375,118.643 174.703,118.315 174.703,115.384 174.572,115.253 U1.3
  Top Layer w0.5: SW1.4 154.17,114.997 C16.2
U1_25: C17.1 SW2.1 SW2.2 U1.25 | length 47.8
  Top Layer w0.254: SW2.1 SW2.2 154.521,109.456 154.521,109.357 154.986,109.357 C17.1 155.979,109.357 156.542,108.794 v1(171.815,108.794) ; v1(178.008,101.822) 188.475,101.822 189.014,101.283 U1.25
  Bottom Layer w0.254: v1(171.815,108.794) 178.008,102.601 v1(178.008,101.822)
U7_19: R1.1 U7.19 | length 3.6
  Top Layer w0.254: R1.1 129.977,144.764 130.858,145.645 130.858,145.981 130.889,146.012 U7.19
pads on no net: SENSOR.25 SENSOR.26 U1.4 U1.5 U1.7 U1.17 U1.18 U1.19 U1.20 U1.21 U1.22 U1.32 U11.2 U11.6 U11.7 U11.8 U11.9 U11.10

## Polygon pours and split planes (outlines as drawn)
GND on Bottom Layer (solid): 38.1,215.011 282.575,215.011 283.083,215.519 283.083,73.025 318.008,38.1 106.807,38.1 94.488,50.419

## Keep-outs
Keep-Out Layer:
  lines w0.254: 101.931,108.617 ccw(c104.931,108.617) 102.955,106.36 cw(c104.931,108.617) 101.931,108.617 ; 101.931,158.256 cw(c104.931,158.256) 104.931,161.256 ccw(c104.931,158.256) 101.931,158.256 ; 133.931,161.256 ccw(c133.931,164.256) 136.931,164.256 cw(c133.931,164.256) 133.931,161.256 ; 136.931,195.256 cw(c141.931,195.256) 141.931,200.256 ccw(c141.931,195.256) 136.931,195.256 ; 141.083,72.998 ccw(c143.058,75.256) 143.058,72.256 cw(c143.058,75.256) 141.083,72.998 ; 154.16,200.256 cw(c154.16,195.256) 158.4,197.906 ccw(c154.16,195.256) 154.16,200.256 ; 161.931,192.256 ccw(c164.759,193.256) 164.759,190.256 cw(c164.759,193.256) 161.931,192.256 ; 199.102,190.256 ccw(c199.102,193.256) 201.931,192.256 cw(c199.102,193.256) 199.102,190.256 ; 205.462,197.906 cw(c209.702,195.256) 209.702,200.256 ccw(c209.702,195.256) 205.462,197.906 ; 220.804,72.256 ccw(c220.804,75.256) 222.779,72.998 cw(c220.804,75.256) 220.804,72.256 ; 221.931,200.256 cw(c221.931,195.256) 226.931,195.256 ccw(c221.931,195.256) 221.931,200.256 ; 226.931,164.256 ccw(c229.931,164.256) 229.931,161.256 cw(c229.931,164.256) 226.931,164.256 ; 258.931,161.256 cw(c258.931,158.256) 261.931,158.256 ccw(c258.931,158.256) 258.931,161.256 ; 260.906,106.36 ccw(c258.931,108.617) 261.931,108.617 cw(c258.931,108.617) 260.906,106.36

## Other copper
Top Layer:
  region net F2_2: 124.079,102.616 124.079,100.076 123.952,99.949 120.65,99.949 120.65,102.616
  region net F2_2: 118.618,106.299 120.904,106.299 120.904,100.203 120.65,99.949 118.745,99.949 118.491,100.203 118.491,100.33

## Silkscreen, mask and mechanical layers (free items; w line width, h text height)
Top Overlay:
  circle w0.254: c181.931,147.256 r27.5
  text "Alican Uçar" at 259.334,130.048 h2.03 r87
  text "ODTÜ ROBOT TOPLULUGU" at 256.286,121.793 h2.03 r90

## Text inside footprints (layer, text, board x,y; h text height)
U10: Top Overlay "12V IN" at 122.428,121.158 h2.03; Top Overlay "?V OUT" at 121.793,95.758 h2.03; Top Overlay "+" at 117.646,122.892 h2.03 r225; Top Overlay "-" at 134.493,122.174 h2.03 r90; Top Overlay "+" at 118.955,97.492 h2.03 r135; Top Overlay "-" at 134.62,96.901 h2.03 r90
U11: Top Overlay "PS0" at 228.275,118.789 h0.81; Top Overlay "PS1" at 230.942,118.789 h0.81; Top Overlay "INT" at 233.736,118.789 h0.81; Top Overlay "ADR" at 235.895,118.789 h0.81; Top Overlay "9Axis Abs." at 221.154,109.229 h1.02; Top Overlay "RST" at 238.562,104.438 h0.81; Top Overlay "SCL" at 236.022,104.438 h0.81; Top Overlay "SDA" at 233.482,104.438 h0.81; Top Overlay "GND" at 230.815,104.438 h0.81; Top Overlay "3vo" at 228.275,104.438 h0.81; Top Overlay "Vin" at 225.876,104.438 h0.81 r2; Top Overlay "BNO055" at 221.281,110.524 h1.47; Top Overlay "3-Axis Accel / +Gyro+Mag / w/Quat, Euler / Heading" at 237.419,114.369 h0.76; Top Overlay "Orientation" at 221.163,107.765 h1.02